# EAGLE board mfrhp (EAGLE 7.7.0)
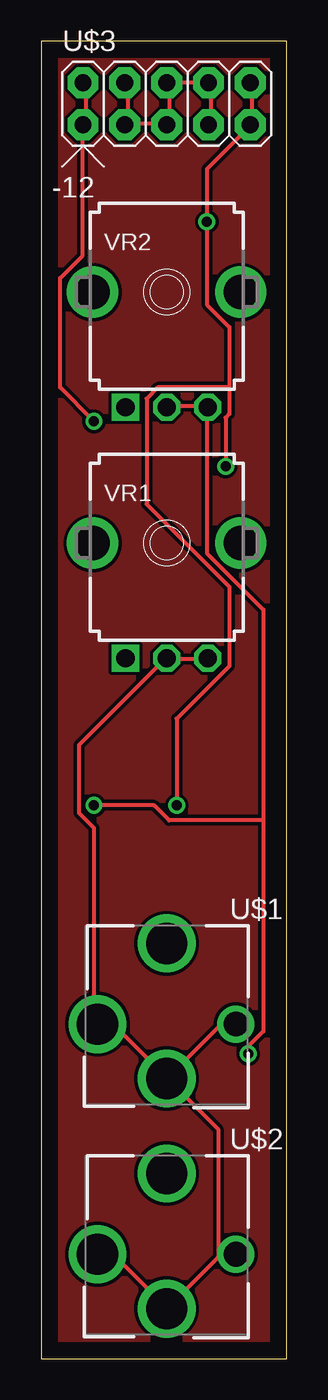
[diagram p0: board, top side]
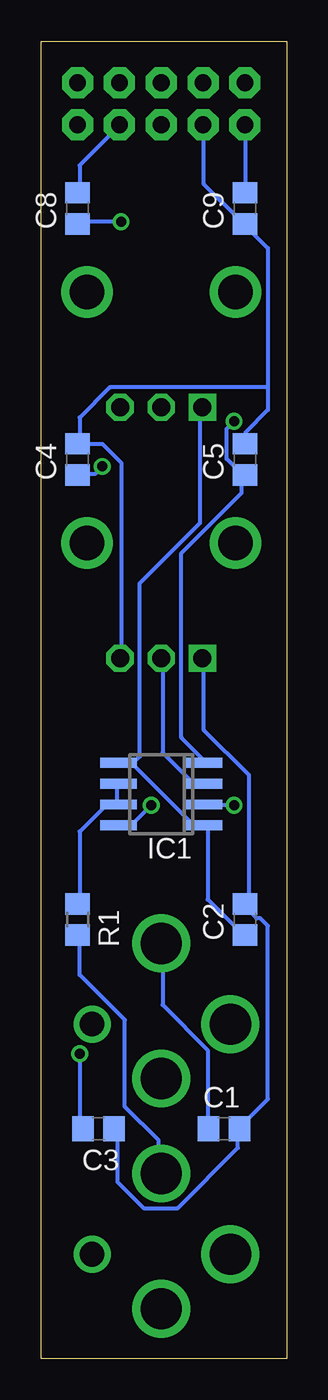
[diagram p1: board, bottom side, seen from below]

Size 14.91 x 80 mm. Coordinates in mm from the lower left corner, seen from the top.
Outline: 0,0 14.91,0 14.91,80 0,80 0,0
Copper layers (1*16): Top 0.035mm / dielectric 1.5mm / Bottom 0.035mm
Design rules "default": minimum track width 10mil, minimum drill 24mil, track to track 8mil, track to pad 8mil, pad to pad 8mil, via to via 8mil, smd to smd 8mil, copper to edge 40mil, drill to drill 8mil, minimum pad ring 10mil, minimum via ring 8mil, stop-mask expansion 4mil, vias tented up to drill 0mil, thermal gap 10mil

## Footprints (pad centres in the part's own frame; a part is rotated, then mirrored left to right if it is on the bottom)
C0805 = smd 1.3 x 1.5: 1 -0.95,0; 2 0.95,0
SO08 = smd 0.6 x 2.2: 1 -1.905,-2.6; 2 -0.635,-2.6; 3 0.635,-2.6; 4 1.905,-2.6; 5 1.905,2.6; 6 0.635,2.6; 7 -0.635,2.6; 8 -1.905,2.6
R0805 = smd 1.3 x 1.5: 1 -0.95,0; 2 0.95,0
ERTHENVAR-JACK = drill 2.5: 1@1 -4.2,0; 2 0,-3.3; 3 0,4.9 | drill 1.5: 1@2 4.2,0
POWER_10 = drill 1.016 pad 1.88 octagon: 1 -5.08,-1.27; 2 -5.08,1.27; 3 -2.54,-1.27; 4 -2.54,1.27; 5 0,-1.27; 6 0,1.27; 7 2.54,-1.27; 8 2.54,1.27; 9 5.08,-1.27; 10 5.08,1.27
9MM_SNAP-IN_POT = drill 1.1 square: 1 -2.5,-7 | drill 1.1 octagon: 2 0,-7; 3 2.5,-7 | drill 2.1 pad 2.794: CHASSIS1 -4.5,0; CHASSIS2 4.5,0

## Placement (x,y rotation side)
C1  0.1u  [C0805]  3.81,13.97 0 bottom
C2  0.1u  [C0805]  2.54,26.67 90 bottom
C3  0.1u  [C0805]  11.43,13.97 180 bottom
C4  0.1u  [C0805]  12.7,54.61 90 bottom
C5  0.1u  [C0805]  2.54,54.61 90 bottom
C8  10u  [C0805]  12.7,69.85 90 bottom
C9  10u  [C0805]  2.54,69.85 90 bottom
IC1  TL072D  [SO08]  7.62,34.29 90 bottom
R1  1k  [R0805]  12.7,26.67 270 bottom
U$1  AUDIO-JACKERTHENVAR  [ERTHENVAR-JACK]  7.62,20.32 0 top
U$2  AUDIO-JACKERTHENVAR  [ERTHENVAR-JACK]  7.62,6.35 0 top
U$3  POWER_SIMPLE10  [POWER_10]  7.62,76.2 0 top
VR1  1k  [9MM_SNAP-IN_POT]  7.62,49.53 0 top
VR2  1M  [9MM_SNAP-IN_POT]  7.62,64.77 0 top

## Library data of the parts
C1-C5 C8 C9 R1 = rcl
IC1 = linear
U$1 U$2 = erthenvar
U$3 = eurorack
VR1 VR2 = MusicThingModular

## Nets
+12V: C4.1 C8.1 IC1.8 U$3.9 U$3.10
-12V: C5.1 C9.2 IC1.4 U$3.1 U$3.2
GND: C4.2 C5.2 C8.2 C9.1 IC1.3 U$1.1@1 U$1.1@2 U$1.2 U$2.1@1 U$2.1@2 U$2.2 U$3.3 U$3.4 U$3.5 U$3.6 U$3.7 U$3.8 VR1.2 VR1.3
IN: C1.1 U$1.3
N$2: C3.2 IC1.2 VR2.2 VR2.3
N$3: C1.2 C2.2 C3.1 VR1.1
N$6: IC1.6 IC1.7 R1.1
N$9: C2.1 IC1.1 IC1.5 VR2.1
OUT: R1.2 U$2.3

## Tracks (layer width: path | path; a pad name or v marks a point on that pad's centre or on a via)
+12V  (via drill 0.61)
  Top 0.254: v11.2,54.18 11.2,57.15 11.43,57.38 11.43,58.98 | 11.43,58.98 11.43,62.64 10.06,64.01 v10.06,69.04 10.06,72.24 12.57,74.75 U$3.9 12.8,74.98 12.8,77.27 U$3.10 | v8.23,33.6 8.23,38.86 11.43,42.06 11.43,46.86 6.4,51.89 6.4,58.29 7.09,58.98 11.43,58.98
  Bottom 0.254: v11.2,54.18 11.66,53.72 12.57,53.72 C4.1 | v10.06,69.04 12.57,69.04 C8.1 | v8.23,33.6 9.37,32.46 10.06,32.46 IC1.8
-12V  (via drill 0.61)
  Top 0.254: U$3.2 2.74,77.27 2.74,74.98 U$3.1 2.52,74.75 2.52,66.98 1.14,65.61 1.14,58.98 v3.2,56.92
  Bottom 0.254: C9.2 2.52,70.87 2.52,74.75 U$3.1 | IC1.4 5.03,36.35 6.4,37.72 6.4,48.92 2.74,52.58 2.74,53.49 C5.1 2.74,53.72 3.66,54.63 3.66,56.46 v3.2,56.92
GND
  Top 0.254: 10.74,6.17 11.66,6.17 U$2.1@2 10.74,6.17 | 10.74,6.17 7.77,3.2 U$2.2 7.54,3.2 4.57,6.17 3.43,6.17 U$2.1@1 | U$1.1@2 11.66,20.12 10.74,20.12 7.77,17.14 U$1.2 | U$1.2 7.54,17.14 4.57,20.12 3.43,20.12 U$1.1@1 3.2,20.34 3.2,32.23 2.29,33.15 2.29,37.26 7.54,42.52 VR1.2 7.77,42.52 10.06,42.52 VR1.3 | 10.74,6.17 10.74,13.95 7.77,16.92 U$1.2 | 5.26,74.98 5.26,77.27 U$3.4 | 5.26,74.98 7.54,74.98 U$3.5 7.77,74.98 7.77,77.27 U$3.6 7.77,77.5 10.06,77.5 U$3.8 10.29,77.27 10.29,74.98 U$3.7 | 5.26,74.98 U$3.3
  Bottom 0.254: C8.2 12.57,70.87 12.57,72.47 10.29,74.75 U$3.7 | IC1.3 5.03,34.98 5.71,34.98 7.54,36.8 7.54,42.52 VR1.2 | 1.14,58.98 1.14,67.44 2.52,68.81 C9.1 2.74,69.04 5.03,71.32 5.03,74.75 U$3.3 | 1.14,58.98 1.14,57.61 2.52,56.24 2.52,55.78 C5.2 | 1.14,58.98 10.74,58.98 12.57,57.15 12.57,55.78 C4.2 12.57,55.55 11.2,55.55 10.06,54.41 10.06,42.75 VR1.3
IN
  Bottom 0.254: C1.1 4.8,14.17 4.8,18.75 7.54,21.49 7.54,25.15 U$1.3
N$1
  pour Top: 0,80.01 15.24,80.01 15.24,0 0,0
N$2  (via drill 0.61)
  Top 0.254: v12.57,18.52 12.57,18.97 13.49,19.89 13.49,32.69 | 13.49,32.69 13.49,45.49 10.06,48.92 10.06,57.61 VR2.3 10.06,57.84 7.77,57.84 VR2.2 | v3.2,33.6 6.86,33.6 7.77,32.69 13.49,32.69
  Bottom 0.254: v12.57,18.52 12.57,14.17 C3.2 | v3.2,33.6 4.8,33.6 IC1.2
N$3
  Bottom 0.254: C3.1 10.29,13.95 10.29,10.74 8.69,9.14 6.63,9.14 2.97,12.8 2.97,13.95 C1.2 2.74,14.17 1.14,15.77 1.14,26.29 1.6,26.75 1.83,26.75 2.52,27.43 C2.2 2.52,27.66 2.29,27.89 2.29,35.43 5.03,38.18 5.03,42.52 VR1.1
N$6
  Bottom 0.254: R1.1 12.57,27.66 12.57,32 10.97,33.6 10.29,33.6 IC1.7 10.29,33.83 10.29,34.75 IC1.6
N$9
  Bottom 0.254: C2.1 2.74,25.83 4.8,27.89 4.8,32.23 IC1.1 5.03,32.46 5.71,32.46 9.37,36.12 | 9.37,36.12 10.06,36.12 IC1.5 9.37,36.12 | 9.37,36.12 8.91,36.58 8.91,47.09 5.26,50.75 5.26,57.61 VR2.1
OUT
  Bottom 0.254: R1.2 12.57,25.6 12.57,23.32 9.83,20.57 9.83,15.32 7.77,13.26 7.77,11.43 U$2.3